# EAGLE board panelized (EAGLE 5.07), part 1 of 2
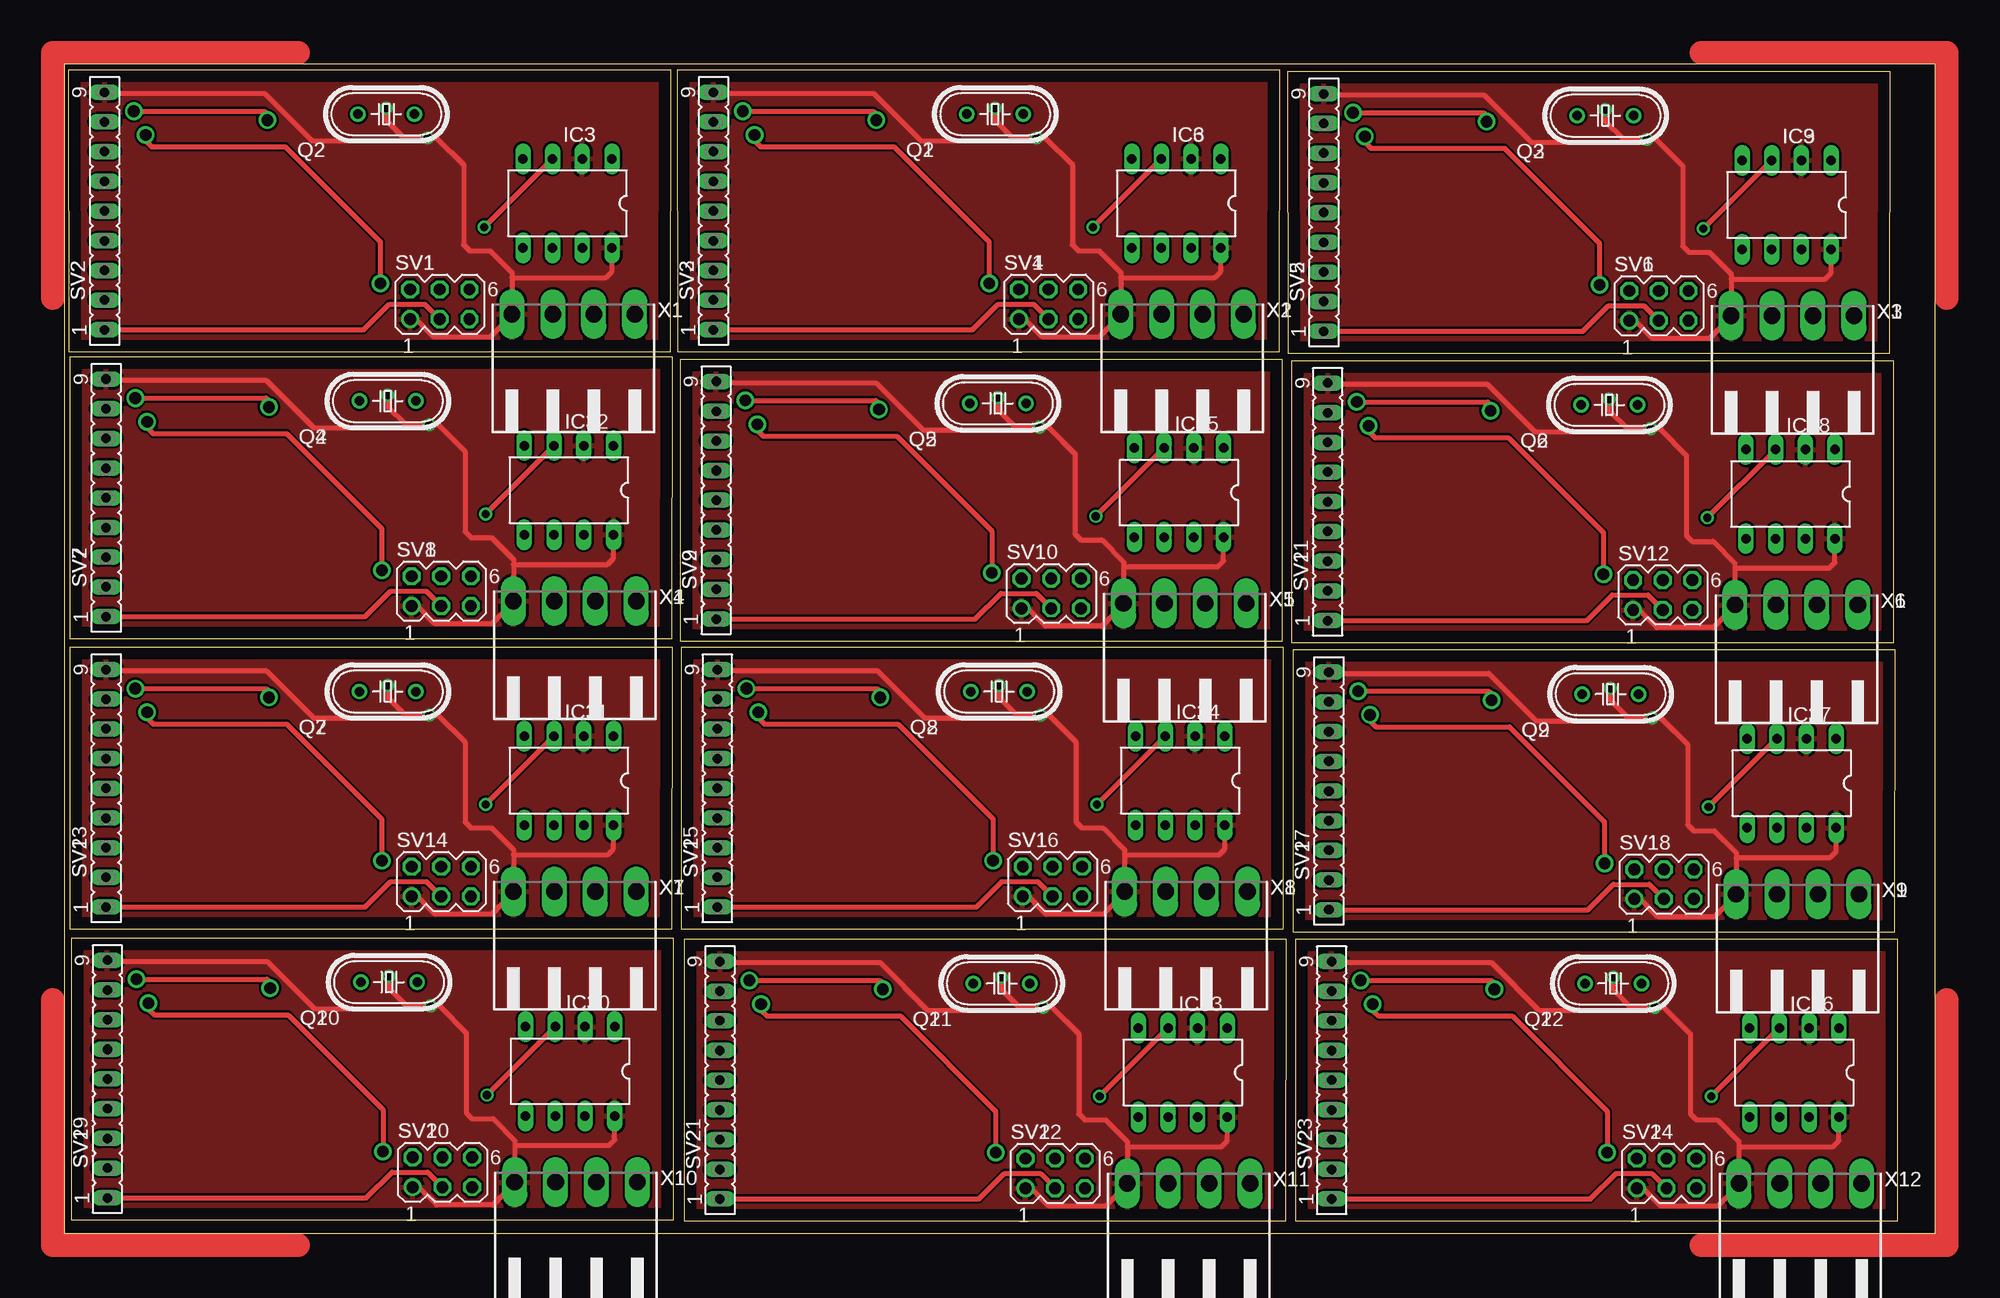
[diagram p0: board, top side]
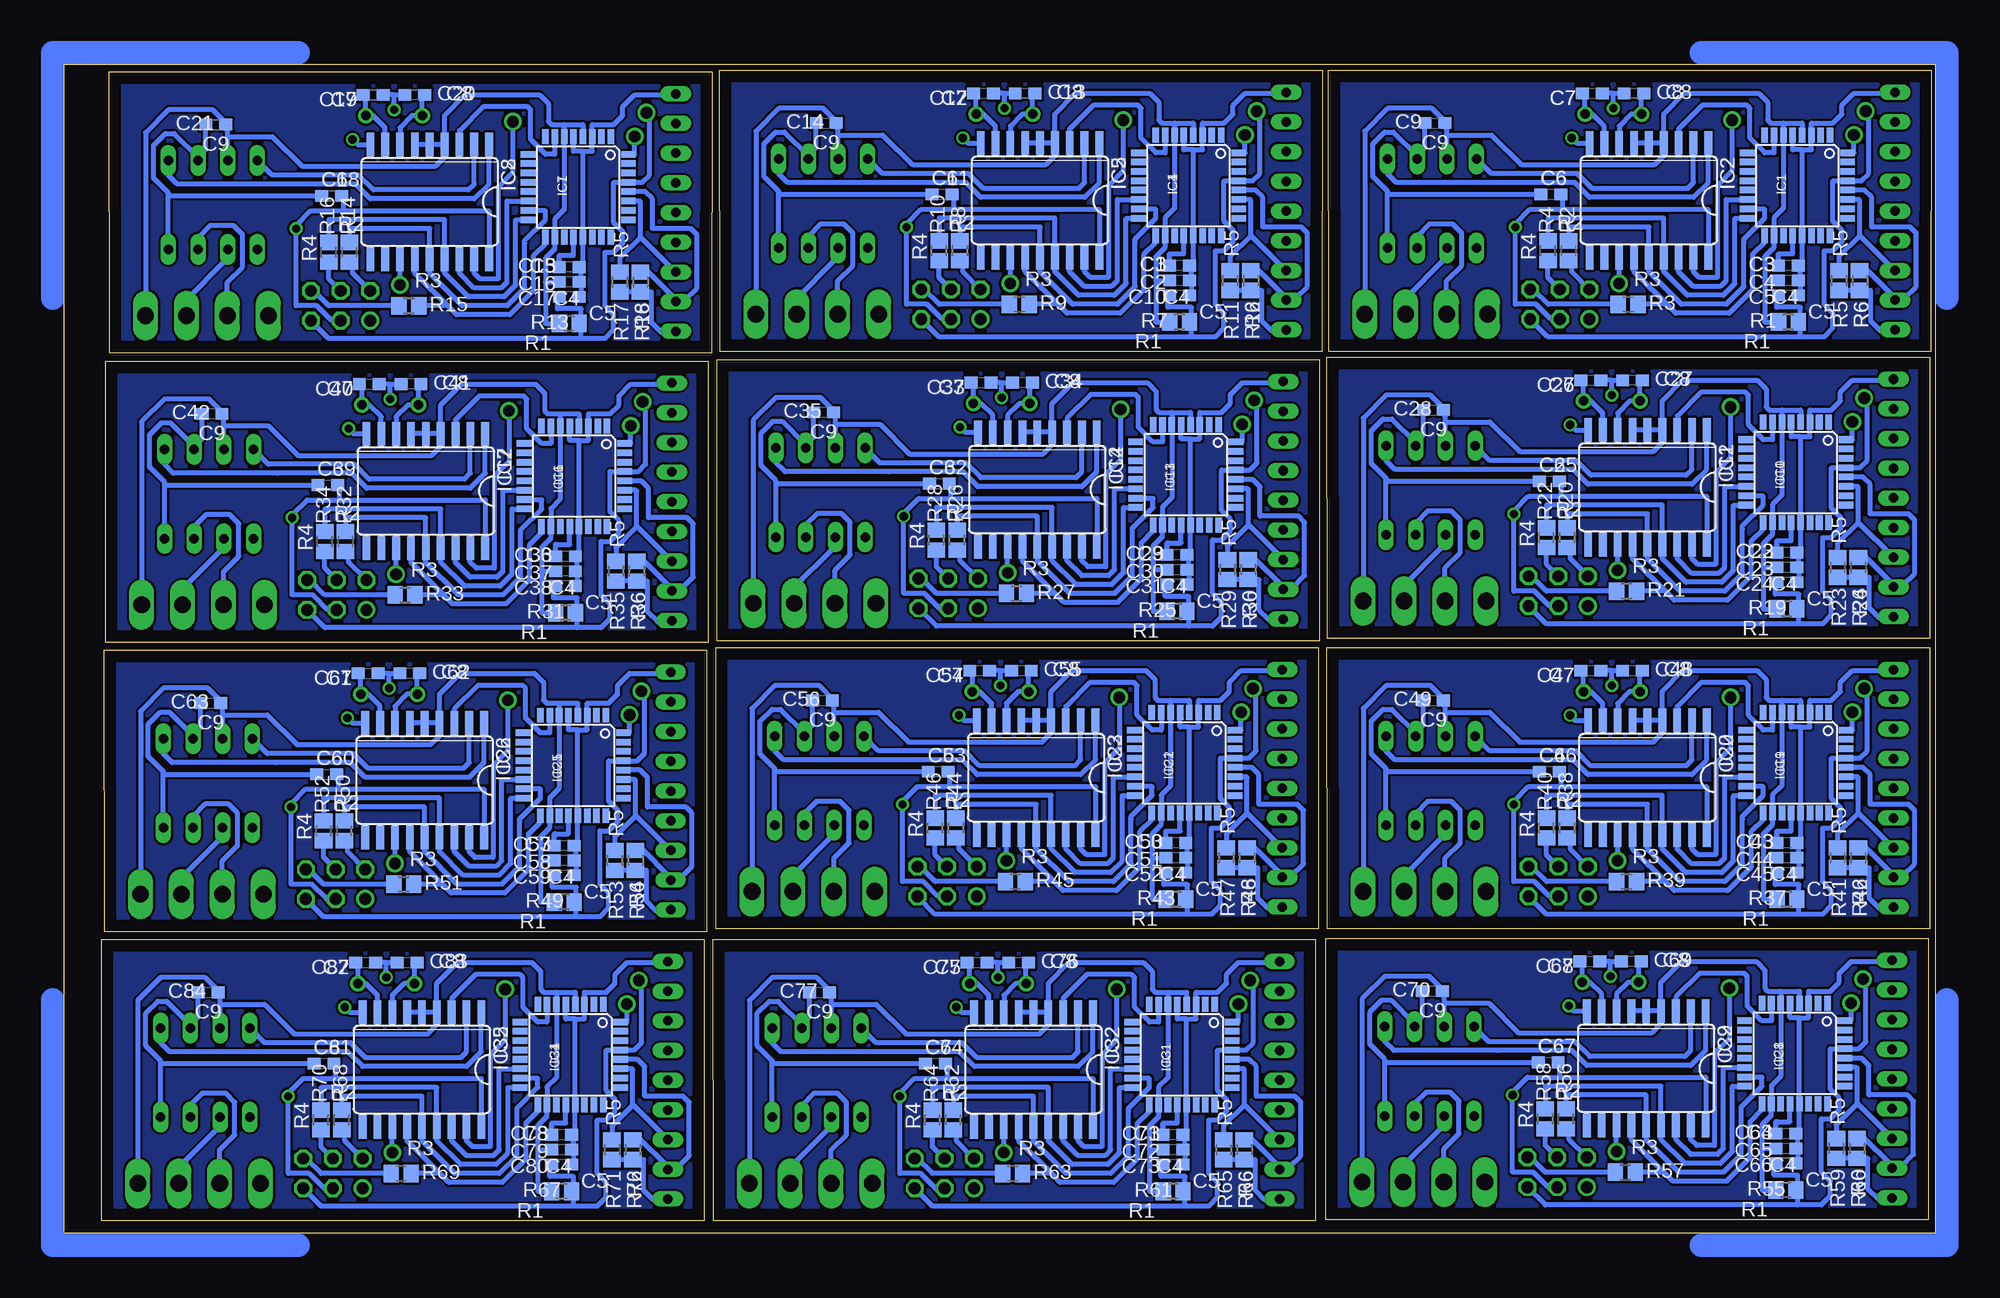
[diagram p1: board, bottom side, seen from below]

Size 160 x 100 mm. Coordinates in mm from the lower left corner, seen from the top.
Outline: 0,0 160,0 160,100 0,100 0,0
Outline: 0.36,75.41 51.87,75.42 51.88,99.5 0.35,99.49 0.36,75.41
Outline: 52.43,75.41 103.94,75.42 103.95,99.5 52.42,99.49 52.43,75.41
Outline: 104.62,75.29 156.13,75.29 156.15,99.37 104.62,99.36 104.62,75.29
Outline: 0.48,50.88 51.99,50.88 52.01,74.96 0.48,74.96 0.48,50.88
Outline: 52.66,50.67 104.16,50.67 104.18,74.76 52.65,74.75 52.66,50.67
Outline: 104.95,50.55 156.46,50.55 156.48,74.63 104.95,74.62 104.95,50.55
Outline: 0.48,26.04 51.99,26.04 52.01,50.12 0.48,50.11 0.48,26.04
Outline: 52.76,26.04 104.27,26.04 104.28,50.12 52.76,50.11 52.76,26.04
Outline: 105.06,25.81 156.56,25.81 156.58,49.89 105.05,49.89 105.06,25.81
Outline: 0.59,1.17 52.09,1.17 52.11,25.25 0.58,25.25 0.59,1.17
Outline: 52.99,1.07 104.49,1.07 104.51,25.15 52.98,25.15 52.99,1.07
Outline: 105.28,1.07 156.79,1.07 156.81,25.15 105.28,25.15 105.28,1.07
Copper layers (1*16): Top 0.035mm / dielectric 1.5mm / Bottom 0.035mm
Design rules "default": minimum track width 10mil, minimum drill 24mil, track to track 8mil, track to pad 8mil, pad to pad 8mil, via to via 8mil, smd to smd 8mil, copper to edge 40mil, drill to drill 8mil, minimum pad ring 10mil, minimum via ring 8mil, stop-mask expansion 4mil, vias tented up to drill 0mil, thermal gap 10mil

## Footprints (pad centres in the part's own frame; a part is rotated, then mirrored left to right if it is on the bottom)
C0603 = smd 1.1 x 1: 1 -0.85,0; 2 0.85,0
TQFP32-08 = smd 1.27 x 0.559: 1 -4.293,2.8; 2 -4.293,2; 3 -4.293,1.2; 4 -4.293,0.4; 5 -4.293,-0.4; 6 -4.293,-1.2; 7 -4.293,-2; 8 -4.293,-2.8; 17 4.293,-2.8; 18 4.293,-2; 19 4.293,-1.2; 20 4.293,-0.4; 21 4.293,0.4; 22 4.293,1.2; 23 4.293,2; 24 4.293,2.8 | smd 0.559 x 1.27: 9 -2.8,-4.293; 10 -2,-4.293; 11 -1.2,-4.293; 12 -0.4,-4.293; 13 0.4,-4.293; 14 1.2,-4.293; 15 2,-4.293; 16 2.8,-4.293; 25 2.8,4.293; 26 2,4.293; 27 1.2,4.293; 28 0.4,4.293; 29 -0.4,4.293; 30 -1.2,4.293; 31 -2,4.293; 32 -2.8,4.293
SO18L = smd 0.66 x 2.032: 1 -5.08,-4.902; 2 -3.81,-4.902; 3 -2.54,-4.902; 4 -1.27,-4.902; 5 0,-4.902; 6 1.27,-4.902; 7 2.54,-4.902; 8 3.81,-4.902; 9 5.08,-4.902; 10 5.08,4.902; 11 3.81,4.902; 12 2.54,4.902; 13 1.27,4.902; 14 0,4.902; 15 -1.27,4.902; 16 -2.54,4.902; 17 -3.81,4.902; 18 -5.08,4.902
DIL08 = drill 0.813 long: 1 -3.81,-3.81; 2 -1.27,-3.81; 3 1.27,-3.81; 4 3.81,-3.81; 5 3.81,3.81; 6 1.27,3.81; 7 -1.27,3.81; 8 -3.81,3.81
HC49U-V = drill 0.813 round: 1 -2.413,0; 2 2.413,0
R0805 = smd 1.3 x 1.5: 1 -0.85,0; 2 0.85,0
MA03-2 = drill 1.016 round: 1 -2.54,-1.27 | drill 1.016 octagon: 2 -2.54,1.27; 3 0,-1.27; 4 0,1.27; 5 2.54,-1.27; 6 2.54,1.27
FE09 = drill 0.813 long: 1 -10.16,0; 2 -7.62,0; 3 -5.08,0; 4 -2.54,0; 5 0,0; 6 2.54,0; 7 5.08,0; 8 7.62,0; 9 10.16,0
90-4 = drill 1.422 long: 1 -5.25,5.25; 2 -1.75,5.25; 3 1.75,5.25; 4 5.25,5.25

## Placement (x,y rotation side)
C1  100n  [C0603]  64.62,82.78 180 bottom
C2  100n  [C0603]  64.62,81.51 180 bottom
C3  100n  [C0603]  12.55,82.78 180 bottom
C4  100n  [C0603]  12.55,81.51 180 bottom
C5  100n  [C0603]  12.55,80.24 180 bottom
C6  100n  [C0603]  32.87,88.87 0 bottom
C7  22p  [C0603]  29.31,97.51 0 bottom
C8  22p  [C0603]  25.76,97.51 180 bottom
C9  100n  [C0603]  42.77,94.97 0 bottom
C10  100n  [C0603]  64.62,80.24 180 bottom
C11  100n  [C0603]  84.94,88.87 0 bottom
C12  22p  [C0603]  81.38,97.51 0 bottom
C13  22p  [C0603]  77.83,97.51 180 bottom
C14  100n  [C0603]  94.84,94.97 0 bottom
C15  100n  [C0603]  116.81,82.65 180 bottom
C16  100n  [C0603]  116.81,81.38 180 bottom
C17  100n  [C0603]  116.81,80.11 180 bottom
C18  100n  [C0603]  137.13,88.75 0 bottom
C19  22p  [C0603]  133.58,97.38 0 bottom
C20  22p  [C0603]  130.02,97.38 180 bottom
C21  100n  [C0603]  147.04,94.84 0 bottom
C22  100n  [C0603]  12.67,58.24 180 bottom
C23  100n  [C0603]  12.67,56.97 180 bottom
C24  100n  [C0603]  12.67,55.7 180 bottom
C25  100n  [C0603]  32.99,64.34 0 bottom
C26  22p  [C0603]  29.44,72.97 0 bottom
C27  22p  [C0603]  25.88,72.97 180 bottom
C28  100n  [C0603]  42.9,70.43 0 bottom
C29  100n  [C0603]  64.85,58.04 180 bottom
C30  100n  [C0603]  64.85,56.77 180 bottom
C31  100n  [C0603]  64.85,55.5 180 bottom
C32  100n  [C0603]  85.17,64.14 0 bottom
C33  22p  [C0603]  81.61,72.77 0 bottom
C34  22p  [C0603]  78.05,72.77 180 bottom
C35  100n  [C0603]  95.07,70.23 0 bottom
C36  100n  [C0603]  117.14,57.91 180 bottom
C37  100n  [C0603]  117.14,56.64 180 bottom
C38  100n  [C0603]  117.14,55.37 180 bottom
C39  100n  [C0603]  137.46,64.01 0 bottom
C40  22p  [C0603]  133.91,72.64 0 bottom
C41  22p  [C0603]  130.35,72.64 180 bottom
C42  100n  [C0603]  147.37,70.1 0 bottom
C43  100n  [C0603]  12.67,33.4 180 bottom
C44  100n  [C0603]  12.67,32.13 180 bottom
C45  100n  [C0603]  12.67,30.86 180 bottom
C46  100n  [C0603]  32.99,39.5 0 bottom
C47  22p  [C0603]  29.44,48.13 0 bottom
C48  22p  [C0603]  25.88,48.13 180 bottom
C49  100n  [C0603]  42.9,45.59 0 bottom
C50  100n  [C0603]  64.95,33.4 180 bottom
C51  100n  [C0603]  64.95,32.13 180 bottom
C52  100n  [C0603]  64.95,30.86 180 bottom
C53  100n  [C0603]  85.27,39.5 0 bottom
C54  22p  [C0603]  81.71,48.13 0 bottom
C55  22p  [C0603]  78.16,48.13 180 bottom
C56  100n  [C0603]  95.17,45.59 0 bottom
C57  100n  [C0603]  117.25,33.17 180 bottom
C58  100n  [C0603]  117.25,31.9 180 bottom
C59  100n  [C0603]  117.25,30.63 180 bottom
C60  100n  [C0603]  137.57,39.27 0 bottom
C61  22p  [C0603]  134.01,47.9 0 bottom
C62  22p  [C0603]  130.45,47.9 180 bottom
C63  100n  [C0603]  147.47,45.36 0 bottom
C64  100n  [C0603]  12.78,8.53 180 bottom
C65  100n  [C0603]  12.78,7.26 180 bottom
C66  100n  [C0603]  12.78,5.99 180 bottom
C67  100n  [C0603]  33.1,14.63 0 bottom
C68  22p  [C0603]  29.54,23.27 0 bottom
C69  22p  [C0603]  25.98,23.27 180 bottom
C70  100n  [C0603]  43,20.73 0 bottom
C71  100n  [C0603]  65.18,8.43 180 bottom
C72  100n  [C0603]  65.18,7.16 180 bottom
C73  100n  [C0603]  65.18,5.89 180 bottom
C74  100n  [C0603]  85.5,14.53 0 bottom
C75  22p  [C0603]  81.94,23.16 0 bottom
C76  22p  [C0603]  78.38,23.16 180 bottom
C77  100n  [C0603]  95.4,20.62 0 bottom
C78  100n  [C0603]  117.47,8.43 180 bottom
C79  100n  [C0603]  117.47,7.16 180 bottom
C80  100n  [C0603]  117.47,5.89 180 bottom
C81  100n  [C0603]  137.79,14.53 0 bottom
C82  22p  [C0603]  134.24,23.16 0 bottom
C83  22p  [C0603]  130.68,23.16 180 bottom
C84  100n  [C0603]  147.7,20.62 0 bottom
IC1  MEGA8-AI  [TQFP32-08]  11.79,89.64 270 bottom
IC2  MCP2515-E/SO  [SO18L]  24.49,88.37 180 bottom
IC3  PCA82C250  [DIL08]  43.03,88.11 180 top
IC4  MEGA8-AI  [TQFP32-08]  63.86,89.64 270 bottom
IC5  MCP2515-E/SO  [SO18L]  76.56,88.37 180 bottom
IC6  PCA82C250  [DIL08]  95.1,88.11 180 top
IC7  MEGA8-AI  [TQFP32-08]  116.05,89.51 270 bottom
IC8  MCP2515-E/SO  [SO18L]  128.75,88.24 180 bottom
IC9  PCA82C250  [DIL08]  147.29,87.99 180 top
IC10  MEGA8-AI  [TQFP32-08]  11.91,65.1 270 bottom
IC11  MCP2515-E/SO  [SO18L]  24.61,63.83 180 bottom
IC12  PCA82C250  [DIL08]  43.15,63.58 180 top
IC13  MEGA8-AI  [TQFP32-08]  64.08,64.9 270 bottom
IC14  MCP2515-E/SO  [SO18L]  76.78,63.63 180 bottom
IC15  PCA82C250  [DIL08]  95.33,63.37 180 top
IC16  MEGA8-AI  [TQFP32-08]  116.38,64.77 270 bottom
IC17  MCP2515-E/SO  [SO18L]  129.08,63.5 180 bottom
IC18  PCA82C250  [DIL08]  147.62,63.25 180 top
IC19  MEGA8-AI  [TQFP32-08]  11.91,40.26 270 bottom
IC20  MCP2515-E/SO  [SO18L]  24.61,38.99 180 bottom
IC21  PCA82C250  [DIL08]  43.15,38.73 180 top
IC22  MEGA8-AI  [TQFP32-08]  64.19,40.26 270 bottom
IC23  MCP2515-E/SO  [SO18L]  76.89,38.99 180 bottom
IC24  PCA82C250  [DIL08]  95.43,38.73 180 top
IC25  MEGA8-AI  [TQFP32-08]  116.48,40.03 270 bottom
IC26  MCP2515-E/SO  [SO18L]  129.18,38.76 180 bottom
IC27  PCA82C250  [DIL08]  147.73,38.51 180 top
IC28  MEGA8-AI  [TQFP32-08]  12.01,15.39 270 bottom
IC29  MCP2515-E/SO  [SO18L]  24.71,14.12 180 bottom
IC30  PCA82C250  [DIL08]  43.26,13.87 180 top
IC31  MEGA8-AI  [TQFP32-08]  64.41,15.29 270 bottom
IC32  MCP2515-E/SO  [SO18L]  77.11,14.02 180 bottom
IC33  PCA82C250  [DIL08]  95.66,13.77 180 top
IC34  MEGA8-AI  [TQFP32-08]  116.71,15.29 270 bottom
IC35  MCP2515-E/SO  [SO18L]  129.41,14.02 180 bottom
IC36  PCA82C250  [DIL08]  147.96,13.77 180 top
Q1  16MHz  [HC49U-V]  79.6,95.73 0 top
Q2  16MHz  [HC49U-V]  27.53,95.73 0 top
Q3  16MHz  [HC49U-V]  131.8,95.61 0 top
Q4  16MHz  [HC49U-V]  27.66,71.2 0 top
Q5  16MHz  [HC49U-V]  79.83,70.99 0 top
Q6  16MHz  [HC49U-V]  132.13,70.87 0 top
Q7  16MHz  [HC49U-V]  27.66,46.35 0 top
Q8  16MHz  [HC49U-V]  79.93,46.35 0 top
Q9  16MHz  [HC49U-V]  132.23,46.13 0 top
Q10  16MHz  [HC49U-V]  27.76,21.49 0 top
Q11  16MHz  [HC49U-V]  80.16,21.39 0 top
Q12  16MHz  [HC49U-V]  132.46,21.39 0 top
R1  10K  [R0805]  12.55,77.95 180 bottom
R2  4K7  [R0805]  31.34,84.05 90 bottom
R3  4K7  [R0805]  26.26,79.48 0 bottom
R4  4K7  [R0805]  33.12,84.05 90 bottom
R5  4K7  [R0805]  8.23,81.51 270 bottom
R6  4K7  [R0805]  6.45,81.51 270 bottom
R7  10K  [R0805]  64.62,77.95 180 bottom
R8  4K7  [R0805]  83.41,84.05 90 bottom
R9  4K7  [R0805]  78.33,79.48 0 bottom
R10  4K7  [R0805]  85.19,84.05 90 bottom
R11  4K7  [R0805]  60.3,81.51 270 bottom
R12  4K7  [R0805]  58.52,81.51 270 bottom
R13  10K  [R0805]  116.81,77.83 180 bottom
R14  4K7  [R0805]  135.61,83.92 90 bottom
R15  4K7  [R0805]  130.53,79.35 0 bottom
R16  4K7  [R0805]  137.39,83.92 90 bottom
R17  4K7  [R0805]  112.5,81.38 270 bottom
R18  4K7  [R0805]  110.72,81.38 270 bottom
R19  10K  [R0805]  12.67,53.42 180 bottom
R20  4K7  [R0805]  31.47,59.51 90 bottom
R21  4K7  [R0805]  26.39,54.94 0 bottom
R22  4K7  [R0805]  33.25,59.51 90 bottom
R23  4K7  [R0805]  8.36,56.97 270 bottom
R24  4K7  [R0805]  6.58,56.97 270 bottom
R25  10K  [R0805]  64.85,53.21 180 bottom
R26  4K7  [R0805]  83.64,59.31 90 bottom
R27  4K7  [R0805]  78.56,54.74 0 bottom
R28  4K7  [R0805]  85.42,59.31 90 bottom
R29  4K7  [R0805]  60.53,56.77 270 bottom
R30  4K7  [R0805]  58.75,56.77 270 bottom
R31  10K  [R0805]  117.14,53.09 180 bottom
R32  4K7  [R0805]  135.94,59.18 90 bottom
R33  4K7  [R0805]  130.86,54.61 0 bottom
R34  4K7  [R0805]  137.72,59.18 90 bottom
R35  4K7  [R0805]  112.83,56.64 270 bottom
R36  4K7  [R0805]  111.05,56.64 270 bottom
R37  10K  [R0805]  12.67,28.57 180 bottom
R38  4K7  [R0805]  31.47,34.67 90 bottom
R39  4K7  [R0805]  26.39,30.1 0 bottom
R40  4K7  [R0805]  33.25,34.67 90 bottom
R41  4K7  [R0805]  8.36,32.13 270 bottom
R42  4K7  [R0805]  6.58,32.13 270 bottom
R43  10K  [R0805]  64.95,28.57 180 bottom
R44  4K7  [R0805]  83.74,34.67 90 bottom
R45  4K7  [R0805]  78.66,30.1 0 bottom
R46  4K7  [R0805]  85.52,34.67 90 bottom
R47  4K7  [R0805]  60.63,32.13 270 bottom
R48  4K7  [R0805]  58.85,32.13 270 bottom
R49  10K  [R0805]  117.25,28.35 180 bottom
R50  4K7  [R0805]  136.04,34.44 90 bottom
R51  4K7  [R0805]  130.96,29.87 0 bottom
R52  4K7  [R0805]  137.82,34.44 90 bottom
R53  4K7  [R0805]  112.93,31.9 270 bottom
R54  4K7  [R0805]  111.15,31.9 270 bottom
R55  10K  [R0805]  12.78,3.71 180 bottom
R56  4K7  [R0805]  31.57,9.8 90 bottom
R57  4K7  [R0805]  26.49,5.23 0 bottom
R58  4K7  [R0805]  33.35,9.8 90 bottom
R59  4K7  [R0805]  8.46,7.26 270 bottom
R60  4K7  [R0805]  6.68,7.26 270 bottom
R61  10K  [R0805]  65.18,3.61 180 bottom
R62  4K7  [R0805]  83.97,9.7 90 bottom
R63  4K7  [R0805]  78.89,5.13 0 bottom
R64  4K7  [R0805]  85.75,9.7 90 bottom
R65  4K7  [R0805]  60.86,7.16 270 bottom
R66  4K7  [R0805]  59.08,7.16 270 bottom
R67  10K  [R0805]  117.47,3.61 180 bottom
R68  4K7  [R0805]  136.27,9.7 90 bottom
R69  4K7  [R0805]  131.19,5.13 0 bottom
R70  4K7  [R0805]  138.05,9.7 90 bottom
R71  4K7  [R0805]  113.16,7.16 270 bottom
R72  4K7  [R0805]  111.38,7.16 270 bottom
SV1  [MA03-2]  32.11,79.48 0 top
SV2  [FE09]  3.45,87.45 90 top
SV3  [FE09]  55.52,87.45 90 top
SV4  [MA03-2]  84.18,79.48 0 top
SV5  [FE09]  107.72,87.32 90 top
SV6  [MA03-2]  136.37,79.35 0 top
SV7  [FE09]  3.58,62.91 90 top
SV8  [MA03-2]  32.23,54.94 0 top
SV9  [FE09]  55.75,62.71 90 top
SV10  [MA03-2]  84.4,54.74 0 top
SV11  [FE09]  108.05,62.58 90 top
SV12  [MA03-2]  136.7,54.61 0 top
SV13  [FE09]  3.58,38.07 90 top
SV14  [MA03-2]  32.23,30.1 0 top
SV15  [FE09]  55.85,38.07 90 top
SV16  [MA03-2]  84.51,30.1 0 top
SV17  [FE09]  108.15,37.84 90 top
SV18  [MA03-2]  136.8,29.87 0 top
SV19  [FE09]  3.68,13.21 90 top
SV20  [MA03-2]  32.33,5.23 0 top
SV21  [FE09]  56.08,13.1 90 top
SV22  [MA03-2]  84.73,5.13 0 top
SV23  [FE09]  108.38,13.1 90 top
SV24  [MA03-2]  137.03,5.13 0 top
X1  [90-4]  43.54,73.38 0 top
X2  [90-4]  95.61,73.38 0 top
X3  [90-4]  147.8,73.25 0 top
X4  [90-4]  43.66,48.84 0 top
X5  [90-4]  95.83,48.64 0 top
X6  [90-4]  148.13,48.51 0 top
X7  [90-4]  43.66,24 0 top
X8  [90-4]  95.94,24 0 top
X9  [90-4]  148.23,23.77 0 top
X10  [90-4]  43.76,-0.86 0 top
X11  [90-4]  96.16,-0.97 0 top
X12  [90-4]  148.46,-0.97 0 top

## Library data of the parts
C1-C84 R1-R72 = rcl
IC1 IC4 IC7 IC10 IC13 IC16 IC19 IC22 IC25 IC28 IC31 IC34 = atmel
IC2 IC5 IC8 IC11 IC14 IC17 IC20 IC23 IC26 IC29 IC32 IC35 = mcp2515
IC3 IC6 IC9 IC12 IC15 IC18 IC21 IC24 IC27 IC30 IC33 IC36 = micro-philips
Q1-Q12 = crystal
SV1 SV4 SV6 SV8 SV10 SV12 SV14 SV16 SV18 SV20 SV22 SV24 = con-lstb
SV2 SV3 SV5 SV7 SV9 SV11 SV13 SV15 SV17 SV19 SV21 SV23 = con-lsta
X1-X12 = con-weidmueller-sl35

## Nets
GND: C3.1 C4.1 C5.1 C6.1 C7.2 C8.2 C9.1 IC1.3 IC1.5 IC1.21 IC2.9 IC3.2 IC3.8 SV1.1 SV2.9 X1.1
GND1: C1.1 C2.1 C10.1 C11.1 C12.2 C13.2 C14.1 IC4.3 IC4.5 IC4.21 IC5.9 IC6.2 IC6.8 SV3.9 SV4.1 X2.1
GND2: C15.1 C16.1 C17.1 C18.1 C19.2 C20.2 C21.1 IC7.3 IC7.5 IC7.21 IC8.9 IC9.2 IC9.8 SV5.9 SV6.1 X3.1
GND3: C22.1 C23.1 C24.1 C25.1 C26.2 C27.2 C28.1 IC10.3 IC10.5 IC10.21 IC11.9 IC12.2 IC12.8 SV7.9 SV8.1 X4.1
GND4: C29.1 C30.1 C31.1 C32.1 C33.2 C34.2 C35.1 IC13.3 IC13.5 IC13.21 IC14.9 IC15.2 IC15.8 SV9.9 SV10.1 X5.1
GND5: C36.1 C37.1 C38.1 C39.1 C40.2 C41.2 C42.1 IC16.3 IC16.5 IC16.21 IC17.9 IC18.2 IC18.8 SV11.9 SV12.1 X6.1
GND6: C43.1 C44.1 C45.1 C46.1 C47.2 C48.2 C49.1 IC19.3 IC19.5 IC19.21 IC20.9 IC21.2 IC21.8 SV13.9 SV14.1 X7.1
GND7: C50.1 C51.1 C52.1 C53.1 C54.2 C55.2 C56.1 IC22.3 IC22.5 IC22.21 IC23.9 IC24.2 IC24.8 SV15.9 SV16.1 X8.1
GND8: C57.1 C58.1 C59.1 C60.1 C61.2 C62.2 C63.1 IC25.3 IC25.5 IC25.21 IC26.9 IC27.2 IC27.8 SV17.9 SV18.1 X9.1
GND9: C64.1 C65.1 C66.1 C67.1 C68.2 C69.2 C70.1 IC28.3 IC28.5 IC28.21 IC29.9 IC30.2 IC30.8 SV19.9 SV20.1 X10.1
GND10: C71.1 C72.1 C73.1 C74.1 C75.2 C76.2 C77.1 IC31.3 IC31.5 IC31.21 IC32.9 IC33.2 IC33.8 SV21.9 SV22.1 X11.1
GND11: C78.1 C79.1 C80.1 C81.1 C82.2 C83.2 C84.1 IC34.3 IC34.5 IC34.21 IC35.9 IC36.2 IC36.8 SV23.9 SV24.1 X12.1
INT: IC1.32 IC2.12
INT1: IC4.32 IC5.12
INT2: IC7.32 IC8.12
INT3: IC10.32 IC11.12
INT4: IC13.32 IC14.12
INT5: IC16.32 IC17.12
INT6: IC19.32 IC20.12
INT7: IC22.32 IC23.12
INT8: IC25.32 IC26.12
INT9: IC28.32 IC29.12
INT10: IC31.32 IC32.12
INT11: IC34.32 IC35.12
MISO: IC1.16 IC2.15 R4.2
MISO1: IC4.16 IC5.15 R10.2
MISO2: IC7.16 IC8.15 R16.2
MISO3: IC10.16 IC11.15 R22.2
MISO4: IC13.16 IC14.15 R28.2
MISO5: IC16.16 IC17.15 R34.2
MISO6: IC19.16 IC20.15 R40.2
MISO7: IC22.16 IC23.15 R46.2
MISO8: IC25.16 IC26.15 R52.2
MISO9: IC28.16 IC29.15 R58.2
MISO10: IC31.16 IC32.15 R64.2
MISO11: IC34.16 IC35.15 R70.2
MOSI: IC1.15 IC2.14 R2.2
MOSI1: IC4.15 IC5.14 R8.2
MOSI2: IC7.15 IC8.14 R14.2
MOSI3: IC10.15 IC11.14 R20.2
MOSI4: IC13.15 IC14.14 R26.2
MOSI5: IC16.15 IC17.14 R32.2
MOSI6: IC19.15 IC20.14 R38.2
MOSI7: IC22.15 IC23.14 R44.2
MOSI8: IC25.15 IC26.14 R50.2
MOSI9: IC28.15 IC29.14 R56.2
MOSI10: IC31.15 IC32.14 R62.2
MOSI11: IC34.15 IC35.14 R68.2
N$1: IC3.7 X1.2
N$2: IC3.6 X1.3
N$4: C1.2 IC4.20
N$5: C3.2 IC1.20
N$6: IC5.1 IC6.1
N$7: IC5.2 IC6.4
N$8: IC1.7 IC2.3
N$9: C12.1 IC5.8 Q1.2
N$10: C13.1 IC5.7 Q1.1
N$11: IC2.1 IC3.1
N$12: IC2.2 IC3.4
N$13: C7.1 IC2.8 Q2.2
N$14: C8.1 IC2.7 Q2.1
N$15: R2.1 SV1.2
N$16: R3.1 SV1.6
N$17: R4.1 SV1.4
N$18: IC6.7 X2.2
N$19: IC6.6 X2.3
N$20: R8.1 SV4.2
N$21: R9.1 SV4.6
N$22: R10.1 SV4.4
N$23: IC4.7 IC5.3
N$25: C15.2 IC7.20
N$26: IC8.1 IC9.1
N$27: IC8.2 IC9.4
N$28: C19.1 IC8.8 Q3.2
N$29: C20.1 IC8.7 Q3.1
N$30: IC9.7 X3.2
N$31: IC9.6 X3.3
N$32: R14.1 SV6.2
N$33: R15.1 SV6.6
N$34: R16.1 SV6.4
N$35: IC7.7 IC8.3
N$37: C22.2 IC10.20
N$38: IC11.1 IC12.1
N$39: IC11.2 IC12.4
N$40: C26.1 IC11.8 Q4.2
N$41: C27.1 IC11.7 Q4.1
N$42: IC12.7 X4.2
N$43: IC12.6 X4.3
N$44: R20.1 SV8.2
N$45: R21.1 SV8.6
N$46: R22.1 SV8.4
N$47: IC10.7 IC11.3
N$49: C29.2 IC13.20
N$50: IC14.1 IC15.1
N$51: IC14.2 IC15.4
N$52: C33.1 IC14.8 Q5.2
N$53: C34.1 IC14.7 Q5.1
N$54: IC15.7 X5.2
N$55: IC15.6 X5.3
N$56: R26.1 SV10.2
N$57: R27.1 SV10.6
N$58: R28.1 SV10.4
N$59: IC13.7 IC14.3
N$61: C36.2 IC16.20
N$62: IC17.1 IC18.1
N$63: IC17.2 IC18.4
N$64: C40.1 IC17.8 Q6.2
N$65: C41.1 IC17.7 Q6.1
N$66: IC18.7 X6.2
N$67: IC18.6 X6.3
N$68: R32.1 SV12.2
N$69: R33.1 SV12.6
N$70: R34.1 SV12.4
N$71: IC16.7 IC17.3
N$73: C43.2 IC19.20
N$74: IC20.1 IC21.1
N$75: IC20.2 IC21.4
N$76: C47.1 IC20.8 Q7.2
N$77: C48.1 IC20.7 Q7.1
N$78: IC21.7 X7.2
N$79: IC21.6 X7.3
N$80: R38.1 SV14.2
N$81: R39.1 SV14.6
N$82: R40.1 SV14.4
N$83: IC19.7 IC20.3
N$85: C50.2 IC22.20
N$86: IC23.1 IC24.1
N$87: IC23.2 IC24.4
N$88: C54.1 IC23.8 Q8.2
N$89: C55.1 IC23.7 Q8.1
N$90: IC24.7 X8.2
N$91: IC24.6 X8.3
N$92: R44.1 SV16.2
N$93: R45.1 SV16.6
N$94: R46.1 SV16.4
N$95: IC22.7 IC23.3
N$97: C57.2 IC25.20
N$98: IC26.1 IC27.1
N$99: IC26.2 IC27.4
N$100: C61.1 IC26.8 Q9.2
N$101: C62.1 IC26.7 Q9.1
N$102: IC27.7 X9.2
N$103: IC27.6 X9.3
N$104: R50.1 SV18.2
N$105: R51.1 SV18.6
N$106: R52.1 SV18.4
N$107: IC25.7 IC26.3
N$109: C64.2 IC28.20
N$110: IC29.1 IC30.1
N$111: IC29.2 IC30.4
N$112: C68.1 IC29.8 Q10.2
N$113: C69.1 IC29.7 Q10.1
N$114: IC30.7 X10.2
N$115: IC30.6 X10.3
N$116: R56.1 SV20.2
N$117: R57.1 SV20.6
N$118: R58.1 SV20.4
N$119: IC28.7 IC29.3
N$121: C71.2 IC31.20
N$122: IC32.1 IC33.1
N$123: IC32.2 IC33.4
N$124: C75.1 IC32.8 Q11.2
N$125: C76.1 IC32.7 Q11.1
N$126: IC33.7 X11.2
N$127: IC33.6 X11.3
N$128: R62.1 SV22.2
N$129: R63.1 SV22.6
N$130: R64.1 SV22.4
N$131: IC31.7 IC32.3
N$133: C78.2 IC34.20
N$134: IC35.1 IC36.1
N$135: IC35.2 IC36.4
N$136: C82.1 IC35.8 Q12.2
N$137: C83.1 IC35.7 Q12.1
N$138: IC36.7 X12.2
N$139: IC36.6 X12.3
N$140: R68.1 SV24.2
N$141: R69.1 SV24.6
N$142: R70.1 SV24.4
N$143: IC34.7 IC35.3
RST: C5.2 IC1.29 IC2.17 R1.1 SV1.5
RST1: C10.2 IC4.29 IC5.17 R7.1 SV4.5
RST2: C17.2 IC7.29 IC8.17 R13.1 SV6.5
RST3: C24.2 IC10.29 IC11.17 R19.1 SV8.5
RST4: C31.2 IC13.29 IC14.17 R25.1 SV10.5
RST5: C38.2 IC16.29 IC17.17 R31.1 SV12.5
RST6: C45.2 IC19.29 IC20.17 R37.1 SV14.5
RST7: C52.2 IC22.29 IC23.17 R43.1 SV16.5
RST8: C59.2 IC25.29 IC26.17 R49.1 SV18.5
RST9: C66.2 IC28.29 IC29.17 R55.1 SV20.5
RST10: C73.2 IC31.29 IC32.17 R61.1 SV22.5
RST11: C80.2 IC34.29 IC35.17 R67.1 SV24.5
SCK: IC1.17 IC2.13 R3.2
SCK1: IC4.17 IC5.13 R9.2
SCK2: IC7.17 IC8.13 R15.2
SCK3: IC10.17 IC11.13 R21.2
SCK4: IC13.17 IC14.13 R27.2
SCK5: IC16.17 IC17.13 R33.2
SCK6: IC19.17 IC20.13 R39.2
SCK7: IC22.17 IC23.13 R45.2
SCK8: IC25.17 IC26.13 R51.2
SCK9: IC28.17 IC29.13 R57.2
SCK10: IC31.17 IC32.13 R63.2
SCK11: IC34.17 IC35.13 R69.2
SCL: IC1.28 R6.1 SV2.2
SCL1: IC4.28 R12.1 SV3.2
SCL2: IC7.28 R18.1 SV5.2
SCL3: IC10.28 R24.1 SV7.2
SCL4: IC13.28 R30.1 SV9.2
SCL5: IC16.28 R36.1 SV11.2
SCL6: IC19.28 R42.1 SV13.2
SCL7: IC22.28 R48.1 SV15.2
SCL8: IC25.28 R54.1 SV17.2
SCL9: IC28.28 R60.1 SV19.2
SCL10: IC31.28 R66.1 SV21.2
SCL11: IC34.28 R72.1 SV23.2
SDA: IC1.27 R5.1 SV2.3
SDA1: IC4.27 R11.1 SV3.3
SDA2: IC7.27 R17.1 SV5.3
SDA3: IC10.27 R23.1 SV7.3
SDA4: IC13.27 R29.1 SV9.3
SDA5: IC16.27 R35.1 SV11.3
SDA6: IC19.27 R41.1 SV13.3
SDA7: IC22.27 R47.1 SV15.3
SDA8: IC25.27 R53.1 SV17.3
SDA9: IC28.27 R59.1 SV19.3
SDA10: IC31.27 R65.1 SV21.3
SDA11: IC34.27 R71.1 SV23.3
SS: IC1.14 IC2.16
SS1: IC4.14 IC5.16
SS2: IC7.14 IC8.16
SS3: IC10.14 IC11.16
SS4: IC13.14 IC14.16
SS5: IC16.14 IC17.16
SS6: IC19.14 IC20.16
SS7: IC22.14 IC23.16
SS8: IC25.14 IC26.16
SS9: IC28.14 IC29.16
SS10: IC31.14 IC32.16
SS11: IC34.14 IC35.16
VCC: C4.2 C6.2 C9.2 IC1.4 IC1.6 IC1.18 IC2.4 IC2.5 IC2.6 IC2.18 IC3.3 R1.2 R5.2 R6.2 SV1.3 SV2.1 X1.4
VCC1: C2.2 C11.2 C14.2 IC4.4 IC4.6 IC4.18 IC5.4 IC5.5 IC5.6 IC5.18 IC6.3 R7.2 R11.2 R12.2 SV3.1 SV4.3 X2.4
VCC2: C16.2 C18.2 C21.2 IC7.4 IC7.6 IC7.18 IC8.4 IC8.5 IC8.6 IC8.18 IC9.3 R13.2 R17.2 R18.2 SV5.1 SV6.3 X3.4
VCC3: C23.2 C25.2 C28.2 IC10.4 IC10.6 IC10.18 IC11.4 IC11.5 IC11.6 IC11.18 IC12.3 R19.2 R23.2 R24.2 SV7.1 SV8.3 X4.4
VCC4: C30.2 C32.2 C35.2 IC13.4 IC13.6 IC13.18 IC14.4 IC14.5 IC14.6 IC14.18 IC15.3 R25.2 R29.2 R30.2 SV9.1 SV10.3 X5.4
VCC5: C37.2 C39.2 C42.2 IC16.4 IC16.6 IC16.18 IC17.4 IC17.5 IC17.6 IC17.18 IC18.3 R31.2 R35.2 R36.2 SV11.1 SV12.3 X6.4
VCC6: C44.2 C46.2 C49.2 IC19.4 IC19.6 IC19.18 IC20.4 IC20.5 IC20.6 IC20.18 IC21.3 R37.2 R41.2 R42.2 SV13.1 SV14.3 X7.4
VCC7: C51.2 C53.2 C56.2 IC22.4 IC22.6 IC22.18 IC23.4 IC23.5 IC23.6 IC23.18 IC24.3 R43.2 R47.2 R48.2 SV15.1 SV16.3 X8.4
VCC8: C58.2 C60.2 C63.2 IC25.4 IC25.6 IC25.18 IC26.4 IC26.5 IC26.6 IC26.18 IC27.3 R49.2 R53.2 R54.2 SV17.1 SV18.3 X9.4
VCC9: C65.2 C67.2 C70.2 IC28.4 IC28.6 IC28.18 IC29.4 IC29.5 IC29.6 IC29.18 IC30.3 R55.2 R59.2 R60.2 SV19.1 SV20.3 X10.4
VCC10: C72.2 C74.2 C77.2 IC31.4 IC31.6 IC31.18 IC32.4 IC32.5 IC32.6 IC32.18 IC33.3 R61.2 R65.2 R66.2 SV21.1 SV22.3 X11.4
VCC11: C79.2 C81.2 C84.2 IC34.4 IC34.6 IC34.18 IC35.4 IC35.5 IC35.6 IC35.18 IC36.3 R67.2 R71.2 R72.2 SV23.1 SV24.3 X12.4

## Tracks (layer width: path | path; a pad name or v marks a point on that pad's centre or on a via)
GND  (via drill 0.7)
  Top 0.406: SV1.1 30.07,78.21 31.6,76.68 36.42,76.68 38.29,78.55 X1.1 38.29,81.76 | 29.06,93.7 v31.09,93.7 31.85,93.7 34.14,91.42 34.14,84.56 34.65,84.05 36.42,84.05 38.29,82.19 38.29,81.76 | 29.06,93.7 27.53,95.22 v27.53,96.24 | IC3.8 46.84,82.27 46.33,81.76 38.29,81.76 | 29.06,93.7 28.8,93.45 21.18,93.45 17.12,97.51 3.55,97.51 SV2.9
  Bottom 0.406: IC1.5 12.19,92.69 11.39,92.69 | 11.39,92.69 IC1.21 11.39,82.63 11.53,82.63 | 11.39,92.69 10.59,92.69 IC1.3 10.59,94.97 8.74,94.97 7.98,95.73 7.98,96.5 6.96,97.51 3.4,97.51 3.45,97.56 SV2.9 | C5.1 11.53,80.24 11.53,81.51 | C3.1 11.53,82.78 11.53,82.63 | C4.1 11.53,81.51 | 11.53,81.51 11.53,82.63 | 28.55,97.51 C7.2 27.53,97.51 | 27.53,97.51 C8.2 | IC3.8 46.84,88.88 | 46.84,88.88 46.84,89.13 48.11,90.4 48.11,93.19 47.09,94.21 46.33,94.21 44.3,92.18 | 44.3,92.18 IC3.2 | C9.1 43.62,92.85 44.3,92.18 | 46.84,88.88 C6.1 | v27.53,96.24 27.53,97.51 | IC2.9 30.66,93.27 v31.09,93.7
  pour Top: 0.36,99.54 51.92,99.54 51.92,75.41 0.36,75.41
GND1  (via drill 0.7)
  Top 0.406: SV4.1 82.14,78.21 83.67,76.68 88.49,76.68 90.36,78.55 X2.1 90.36,81.76 | 81.13,93.7 v83.16,93.7 83.92,93.7 86.21,91.42 86.21,84.56 86.72,84.05 88.49,84.05 90.36,82.19 90.36,81.76 | 81.13,93.7 79.6,95.22 v79.6,96.24 | IC6.8 98.91,82.27 98.4,81.76 90.36,81.76 | 81.13,93.7 80.87,93.45 73.25,93.45 69.19,97.51 55.62,97.51 SV3.9
  Bottom 0.406: IC4.5 64.26,92.69 63.46,92.69 | 63.46,92.69 IC4.21 63.46,82.63 63.6,82.63 | 63.46,92.69 62.66,92.69 IC4.3 62.66,94.97 60.81,94.97 60.05,95.73 60.05,96.5 59.03,97.51 55.47,97.51 55.52,97.56 SV3.9 | C10.1 63.6,80.24 63.6,81.51 | C1.1 63.6,82.78 63.6,82.63 | C2.1 63.6,81.51 | 63.6,81.51 63.6,82.63 | 80.62,97.51 C12.2 79.6,97.51 | 79.6,97.51 C13.2 | IC6.8 98.91,88.88 | 98.91,88.88 98.91,89.13 100.18,90.4 100.18,93.19 99.16,94.21 98.4,94.21 96.37,92.18 | 96.37,92.18 IC6.2 | C14.1 95.69,92.85 96.37,92.18 | 98.91,88.88 C11.1 | v79.6,96.24 79.6,97.51 | IC5.9 82.73,93.27 v83.16,93.7
  pour Top: 52.43,99.54 103.99,99.54 103.99,75.41 52.43,75.41
GND2  (via drill 0.7)
  Top 0.406: SV6.1 134.34,78.08 135.87,76.56 140.69,76.56 142.55,78.42 X3.1 142.55,81.64 | 133.32,93.57 v135.36,93.57 136.12,93.57 138.41,91.29 138.41,84.43 138.91,83.92 140.69,83.92 142.55,82.06 142.55,81.64 | 133.32,93.57 131.8,95.1 v131.8,96.11 | IC9.8 151.1,82.14 150.6,81.64 142.55,81.64 | 133.32,93.57 133.07,93.32 125.45,93.32 121.39,97.38 107.82,97.38 SV5.9
  Bottom 0.406: IC7.5 116.45,92.56 115.65,92.56 | 115.65,92.56 IC7.21 115.65,82.51 115.8,82.51 | 115.65,92.56 114.85,92.56 IC7.3 114.85,94.84 113,94.84 112.24,95.61 112.24,96.37 111.23,97.38 107.67,97.38 107.72,97.43 SV5.9 | C17.1 115.8,80.11 115.8,81.38 | C15.1 115.8,82.65 115.8,82.51 | C16.1 115.8,81.38 | 115.8,81.38 115.8,82.51 | 132.82,97.38 C19.2 131.8,97.38 | 131.8,97.38 C20.2 | IC9.8 151.1,88.75 | 151.1,88.75 151.1,89 152.38,90.27 152.38,93.07 151.36,94.08 150.6,94.08 148.56,92.05 | 148.56,92.05 IC9.2 | C21.1 147.89,92.72 148.56,92.05 | 151.1,88.75 C18.1 | v131.8,96.11 131.8,97.38 | IC8.9 134.93,93.14 v135.36,93.57
  pour Top: 104.62,99.42 156.18,99.42 156.18,75.29 104.62,75.29
GND3  (via drill 0.7)
  Top 0.406: SV8.1 30.2,53.67 31.73,52.15 36.55,52.15 38.41,54.01 X4.1 38.41,57.23 | 29.18,69.16 v31.22,69.16 31.98,69.16 34.27,66.88 34.27,60.02 34.77,59.51 36.55,59.51 38.41,57.65 38.41,57.23 | 29.18,69.16 27.66,70.69 v27.66,71.7 | IC12.8 46.97,57.73 46.46,57.23 38.41,57.23 | 29.18,69.16 28.93,68.91 21.31,68.91 17.25,72.97 3.68,72.97 SV7.9
  Bottom 0.406: IC10.5 12.31,68.15 11.51,68.15 | 11.51,68.15 IC10.21 11.51,58.1 11.66,58.1 | 11.51,68.15 10.71,68.15 IC10.3 10.71,70.43 8.87,70.43 8.1,71.2 8.1,71.96 7.09,72.97 3.53,72.97 3.58,73.02 SV7.9 | C24.1 11.66,55.7 11.66,56.97 | C22.1 11.66,58.24 11.66,58.1 | C23.1 11.66,56.97 | 11.66,56.97 11.66,58.1 | 28.68,72.97 C26.2 27.66,72.97 | 27.66,72.97 C27.2 | IC12.8 46.97,64.34 | 46.97,64.34 46.97,64.59 48.23,65.86 48.23,68.66 47.22,69.67 46.46,69.67 44.42,67.64 | 44.42,67.64 IC12.2 | C28.1 43.75,68.31 44.42,67.64 | 46.97,64.34 C25.1 | v27.66,71.7 27.66,72.97 | IC11.9 30.79,68.73 v31.22,69.16
  pour Top: 0.48,75.01 52.04,75.01 52.04,50.88 0.48,50.88
GND4  (via drill 0.7)
  Top 0.406: SV10.1 82.37,53.47 83.9,51.94 88.72,51.94 90.58,53.8 X5.1 90.58,57.02 | 81.36,68.96 v83.39,68.96 84.15,68.96 86.44,66.67 86.44,59.82 86.94,59.31 88.72,59.31 90.58,57.45 90.58,57.02 | 81.36,68.96 79.83,70.48 v79.83,71.5 | IC15.8 99.14,57.53 98.63,57.02 90.58,57.02 | 81.36,68.96 81.1,68.71 73.48,68.71 69.42,72.77 55.85,72.77 SV9.9
  Bottom 0.406: IC13.5 64.48,67.94 63.68,67.94 | 63.68,67.94 IC13.21 63.68,57.89 63.83,57.89 | 63.68,67.94 62.88,67.94 IC13.3 62.88,70.23 61.04,70.23 60.27,70.99 60.27,71.75 59.26,72.77 55.7,72.77 55.75,72.82 SV9.9 | C31.1 63.83,55.5 63.83,56.77 | C29.1 63.83,58.04 63.83,57.89 | C30.1 63.83,56.77 | 63.83,56.77 63.83,57.89 | 80.85,72.77 C33.2 79.83,72.77 | 79.83,72.77 C34.2 | IC15.8 99.14,64.14 | 99.14,64.14 99.14,64.39 100.41,65.66 100.41,68.45 99.39,69.47 98.63,69.47 96.6,67.44 | 96.6,67.44 IC15.2 | C35.1 95.92,68.11 96.6,67.44 | 99.14,64.14 C32.1 | v79.83,71.5 79.83,72.77 | IC14.9 82.96,68.53 v83.39,68.96
  pour Top: 52.65,74.8 104.22,74.8 104.22,50.67 52.65,50.67
GND5  (via drill 0.7)
  Top 0.406: SV12.1 134.67,53.34 136.19,51.82 141.02,51.82 142.88,53.68 X6.1 142.88,56.9 | 133.66,68.83 v135.69,68.83 136.45,68.83 138.74,66.55 138.74,59.69 139.24,59.18 141.02,59.18 142.88,57.32 142.88,56.9 | 133.66,68.83 132.13,70.36 v132.13,71.37 | IC18.8 151.44,57.4 150.93,56.9 142.88,56.9 | 133.66,68.83 133.4,68.58 125.78,68.58 121.72,72.64 108.15,72.64 SV11.9
  Bottom 0.406: IC16.5 116.78,67.82 115.98,67.82 | 115.98,67.82 IC16.21 115.98,57.77 116.13,57.77 | 115.98,67.82 115.18,67.82 IC16.3 115.18,70.1 113.33,70.1 112.57,70.87 112.57,71.63 111.56,72.64 108,72.64 108.05,72.69 SV11.9 | C38.1 116.13,55.37 116.13,56.64 | C36.1 116.13,57.91 116.13,57.77 | C37.1 116.13,56.64 | 116.13,56.64 116.13,57.77 | 133.15,72.64 C40.2 132.13,72.64 | 132.13,72.64 C41.2 | IC18.8 151.44,64.01 | 151.44,64.01 151.44,64.26 152.71,65.53 152.71,68.33 151.69,69.34 150.93,69.34 148.9,67.31 | 148.9,67.31 IC18.2 | C42.1 148.22,67.98 148.9,67.31 | 151.44,64.01 C39.1 | v132.13,71.37 132.13,72.64 | IC17.9 135.25,68.4 v135.69,68.83
  pour Top: 104.95,74.68 156.51,74.68 156.51,50.55 104.95,50.55
GND6  (via drill 0.7)
  Top 0.406: SV14.1 30.2,28.83 31.73,27.3 36.55,27.3 38.41,29.17 X7.1 38.41,32.38 | 29.18,44.32 v31.22,44.32 31.98,44.32 34.27,42.04 34.27,35.18 34.77,34.67 36.55,34.67 38.41,32.81 38.41,32.38 | 29.18,44.32 27.66,45.85 v27.66,46.86 | IC21.8 46.97,32.89 46.46,32.38 38.41,32.38 | 29.18,44.32 28.93,44.07 21.31,44.07 17.25,48.13 3.68,48.13 SV13.9
  Bottom 0.406: IC19.5 12.31,43.31 11.51,43.31 | 11.51,43.31 IC19.21 11.51,33.26 11.66,33.26 | 11.51,43.31 10.71,43.31 IC19.3 10.71,45.59 8.87,45.59 8.1,46.35 8.1,47.12 7.09,48.13 3.53,48.13 3.58,48.18 SV13.9 | C45.1 11.66,30.86 11.66,32.13 | C43.1 11.66,33.4 11.66,33.26 | C44.1 11.66,32.13 | 11.66,32.13 11.66,33.26 | 28.68,48.13 C47.2 27.66,48.13 | 27.66,48.13 C48.2 | IC21.8 46.97,39.5 | 46.97,39.5 46.97,39.75 48.23,41.02 48.23,43.81 47.22,44.83 46.46,44.83 44.42,42.8 | 44.42,42.8 IC21.2 | C49.1 43.75,43.47 44.42,42.8 | 46.97,39.5 C46.1 | v27.66,46.86 27.66,48.13 | IC20.9 30.79,43.89 v31.22,44.32
  pour Top: 0.48,50.16 52.04,50.16 52.04,26.04 0.48,26.04
GND7  (via drill 0.7)
  Top 0.406: SV16.1 82.47,28.83 84,27.3 88.82,27.3 90.69,29.17 X8.1 90.69,32.38 | 81.46,44.32 v83.49,44.32 84.25,44.32 86.54,42.04 86.54,35.18 87.05,34.67 88.82,34.67 90.69,32.81 90.69,32.38 | 81.46,44.32 79.93,45.85 v79.93,46.86 | IC24.8 99.24,32.89 98.73,32.38 90.69,32.38 | 81.46,44.32 81.2,44.07 73.58,44.07 69.52,48.13 55.95,48.13 SV15.9
  Bottom 0.406: IC22.5 64.59,43.31 63.79,43.31 | 63.79,43.31 IC22.21 63.79,33.26 63.93,33.26 | 63.79,43.31 62.99,43.31 IC22.3 62.99,45.59 61.14,45.59 60.38,46.35 60.38,47.12 59.36,48.13 55.8,48.13 55.85,48.18 SV15.9 | C52.1 63.93,30.86 63.93,32.13 | C50.1 63.93,33.4 63.93,33.26 | C51.1 63.93,32.13 | 63.93,32.13 63.93,33.26 | 80.95,48.13 C54.2 79.93,48.13 | 79.93,48.13 C55.2 | IC24.8 99.24,39.5 | 99.24,39.5 99.24,39.75 100.51,41.02 100.51,43.81 99.49,44.83 98.73,44.83 96.7,42.8 | 96.7,42.8 IC24.2 | C56.1 96.02,43.47 96.7,42.8 | 99.24,39.5 C53.1 | v79.93,46.86 79.93,48.13 | IC23.9 83.06,43.89 v83.49,44.32
  pour Top: 52.76,50.16 104.32,50.16 104.32,26.04 52.76,26.04
GND8  (via drill 0.7)
  Top 0.406: SV18.1 134.77,28.6 136.3,27.08 141.12,27.08 142.98,28.94 X9.1 142.98,32.16 | 133.76,44.09 v135.79,44.09 136.55,44.09 138.84,41.81 138.84,34.95 139.34,34.44 141.12,34.44 142.98,32.58 142.98,32.16 | 133.76,44.09 132.23,45.62 v132.23,46.63 | IC27.8 151.54,32.66 151.03,32.16 142.98,32.16 | 133.76,44.09 133.5,43.84 125.88,43.84 121.82,47.9 108.25,47.9 SV17.9
  Bottom 0.406: IC25.5 116.88,43.08 116.08,43.08 | 116.08,43.08 IC25.21 116.08,33.03 116.23,33.03 | 116.08,43.08 115.28,43.08 IC25.3 115.28,45.36 113.44,45.36 112.67,46.13 112.67,46.89 111.66,47.9 108.1,47.9 108.15,47.95 SV17.9 | C59.1 116.23,30.63 116.23,31.9 | C57.1 116.23,33.17 116.23,33.03 | C58.1 116.23,31.9 | 116.23,31.9 116.23,33.03 | 133.25,47.9 C61.2 132.23,47.9 | 132.23,47.9 C62.2 | IC27.8 151.54,39.27 | 151.54,39.27 151.54,39.52 152.81,40.79 152.81,43.59 151.79,44.6 151.03,44.6 149,42.57 | 149,42.57 IC27.2 | C63.1 148.32,43.24 149,42.57 | 151.54,39.27 C60.1 | v132.23,46.63 132.23,47.9 | IC26.9 135.36,43.66 v135.79,44.09
  pour Top: 105.05,49.94 156.62,49.94 156.62,25.81 105.05,25.81
GND9  (via drill 0.7)
  Top 0.406: SV20.1 30.3,3.96 31.83,2.44 36.65,2.44 38.51,4.3 X10.1 38.51,7.52 | 29.29,19.46 v31.32,19.46 32.08,19.46 34.37,17.17 34.37,10.31 34.87,9.8 36.65,9.8 38.51,7.94 38.51,7.52 | 29.29,19.46 27.76,20.98 v27.76,22 | IC30.8 47.07,8.03 46.56,7.52 38.51,7.52 | 29.29,19.46 29.03,19.2 21.41,19.2 17.35,23.27 3.78,23.27 SV19.9
  Bottom 0.406: IC28.5 12.41,18.44 11.61,18.44 | 11.61,18.44 IC28.21 11.61,8.39 11.76,8.39 | 11.61,18.44 10.81,18.44 IC28.3 10.81,20.73 8.97,20.73 8.2,21.49 8.2,22.25 7.19,23.27 3.63,23.27 3.68,23.32 SV19.9 | C66.1 11.76,5.99 11.76,7.26 | C64.1 11.76,8.53 11.76,8.39 | C65.1 11.76,7.26 | 11.76,7.26 11.76,8.39 | 28.78,23.27 C68.2 27.76,23.27 | 27.76,23.27 C69.2 | IC30.8 47.07,14.63 | 47.07,14.63 47.07,14.88 48.34,16.15 48.34,18.95 47.32,19.96 46.56,19.96 44.53,17.93 | 44.53,17.93 IC30.2 | C70.1 43.85,18.61 44.53,17.93 | 47.07,14.63 C67.1 | v27.76,22 27.76,23.27 | IC29.9 30.89,19.02 v31.32,19.46
  pour Top: 0.58,25.3 52.15,25.3 52.15,1.17 0.58,1.17
GND10  (via drill 0.7)
  Top 0.406: SV22.1 82.7,3.86 84.23,2.34 89.05,2.34 90.91,4.2 X11.1 90.91,7.42 | 81.69,19.36 v83.72,19.36 84.48,19.36 86.77,17.07 86.77,10.21 87.27,9.7 89.05,9.7 90.91,7.84 90.91,7.42 | 81.69,19.36 80.16,20.88 v80.16,21.89 | IC33.8 99.47,7.92 98.96,7.42 90.91,7.42 | 81.69,19.36 81.43,19.1 73.81,19.1 69.75,23.16 56.18,23.16 SV21.9
  Bottom 0.406: IC31.5 64.81,18.34 64.01,18.34 | 64.01,18.34 IC31.21 64.01,8.29 64.16,8.29 | 64.01,18.34 63.21,18.34 IC31.3 63.21,20.62 61.37,20.62 60.6,21.39 60.6,22.15 59.59,23.16 56.03,23.16 56.08,23.21 SV21.9 | C73.1 64.16,5.89 64.16,7.16 | C71.1 64.16,8.43 64.16,8.29 | C72.1 64.16,7.16 | 64.16,7.16 64.16,8.29 | 81.18,23.16 C75.2 80.16,23.16 | 80.16,23.16 C76.2 | IC33.8 99.47,14.53 | 99.47,14.53 99.47,14.78 100.74,16.05 100.74,18.85 99.72,19.86 98.96,19.86 96.93,17.83 | 96.93,17.83 IC33.2 | C77.1 96.25,18.5 96.93,17.83 | 99.47,14.53 C74.1 | v80.16,21.89 80.16,23.16 | IC32.9 83.29,18.92 v83.72,19.36
  pour Top: 52.98,25.2 104.55,25.2 104.55,1.07 52.98,1.07
GND11  (via drill 0.7)
  Top 0.406: SV24.1 135,3.86 136.53,2.34 141.35,2.34 143.21,4.2 X12.1 143.21,7.42 | 133.99,19.36 v136.02,19.36 136.78,19.36 139.06,17.07 139.06,10.21 139.57,9.7 141.35,9.7 143.21,7.84 143.21,7.42 | 133.99,19.36 132.46,20.88 v132.46,21.89 | IC36.8 151.76,7.92 151.26,7.42 143.21,7.42 | 133.99,19.36 133.73,19.1 126.11,19.1 122.05,23.16 108.48,23.16 SV23.9
  Bottom 0.406: IC34.5 117.11,18.34 116.31,18.34 | 116.31,18.34 IC34.21 116.31,8.29 116.46,8.29 | 116.31,18.34 115.51,18.34 IC34.3 115.51,20.62 113.67,20.62 112.9,21.39 112.9,22.15 111.89,23.16 108.33,23.16 108.38,23.21 SV23.9 | C80.1 116.46,5.89 116.46,7.16 | C78.1 116.46,8.43 116.46,8.29 | C79.1 116.46,7.16 | 116.46,7.16 116.46,8.29 | 133.48,23.16 C82.2 132.46,23.16 | 132.46,23.16 C83.2 | IC36.8 151.76,14.53 | 151.76,14.53 151.76,14.78 153.03,16.05 153.03,18.85 152.02,19.86 151.26,19.86 149.22,17.83 | 149.22,17.83 IC36.2 | C84.1 148.55,18.5 149.22,17.83 | 151.76,14.53 C81.1 | v132.46,21.89 132.46,23.16 | IC35.9 135.59,18.92 v136.02,19.36
  pour Top: 105.28,25.2 156.84,25.2 156.84,1.07 105.28,1.07
INT  (via drill 1)
  Top 0.406: v27.03,81.25 27.03,84.81 18.9,92.94 7.47,92.94 6.96,93.45 v6.96,93.95
  Bottom 0.406: IC1.32 6.96,92.44 v6.96,93.95 | 27.03,83.54 IC2.12 v27.03,81.25
INT1  (via drill 1)
  Top 0.406: v79.1,81.25 79.1,84.81 70.97,92.94 59.54,92.94 59.03,93.45 v59.03,93.95
  Bottom 0.406: IC4.32 59.03,92.44 v59.03,93.95 | 79.1,83.54 IC5.12 v79.1,81.25
INT2  (via drill 1)
  Top 0.406: v131.29,81.13 131.29,84.68 123.17,92.81 111.73,92.81 111.23,93.32 v111.23,93.83
  Bottom 0.406: IC7.32 111.23,92.31 v111.23,93.83 | 131.29,83.41 IC8.12 v131.29,81.13
INT3  (via drill 1)
  Top 0.406: v27.15,56.72 27.15,60.27 19.02,68.4 7.59,68.4 7.09,68.91 v7.09,69.42
  Bottom 0.406: IC10.32 7.09,67.9 v7.09,69.42 | 27.15,59 IC11.12 v27.15,56.72
INT4  (via drill 1)
  Top 0.406: v79.32,56.52 79.32,60.07 71.2,68.2 59.77,68.2 59.26,68.71 v59.26,69.22
  Bottom 0.406: IC13.32 59.26,67.7 v59.26,69.22 | 79.32,58.8 IC14.12 v79.32,56.52
INT5  (via drill 1)
  Top 0.406: v131.62,56.39 131.62,59.94 123.5,68.07 112.06,68.07 111.56,68.58 v111.56,69.09
  Bottom 0.406: IC16.32 111.56,67.57 v111.56,69.09 | 131.62,58.67 IC17.12 v131.62,56.39
INT6  (via drill 1)
  Top 0.406: v27.15,31.88 27.15,35.43 19.02,43.56 7.59,43.56 7.09,44.07 v7.09,44.58
  Bottom 0.406: IC19.32 7.09,43.06 v7.09,44.58 | 27.15,34.16 IC20.12 v27.15,31.88
INT7  (via drill 1)
  Top 0.406: v79.43,31.88 79.43,35.43 71.3,43.56 59.87,43.56 59.36,44.07 v59.36,44.58
  Bottom 0.406: IC22.32 59.36,43.06 v59.36,44.58 | 79.43,34.16 IC23.12 v79.43,31.88
INT8  (via drill 1)
  Top 0.406: v131.72,31.65 131.72,35.2 123.6,43.33 112.17,43.33 111.66,43.84 v111.66,44.35
  Bottom 0.406: IC25.32 111.66,42.83 v111.66,44.35 | 131.72,33.93 IC26.12 v131.72,31.65
INT9  (via drill 1)
  Top 0.406: v27.25,7.01 27.25,10.57 19.13,18.69 7.7,18.69 7.19,19.2 v7.19,19.71
  Bottom 0.406: IC28.32 7.19,18.19 v7.19,19.71 | 27.25,9.3 IC29.12 v27.25,7.01
INT10  (via drill 1)
  Top 0.406: v79.65,6.91 79.65,10.46 71.53,18.59 60.1,18.59 59.59,19.1 v59.59,19.61
  Bottom 0.406: IC31.32 59.59,18.09 v59.59,19.61 | 79.65,9.2 IC32.12 v79.65,6.91
INT11  (via drill 1)
  Top 0.406: v131.95,6.91 131.95,10.46 123.83,18.59 112.39,18.59 111.89,19.1 v111.89,19.61
  Bottom 0.406: IC34.32 111.89,18.09 v111.89,19.61 | 131.95,9.2 IC35.12 v131.95,6.91
MISO
  Bottom 0.406: IC1.16 17.12,86.84 17.12,81.25 18.14,80.24 21.18,80.24 23.22,82.27 IC2.15 23.22,86.84 33.12,86.84 R4.2
MISO1
  Bottom 0.406: IC4.16 69.19,86.84 69.19,81.25 70.21,80.24 73.25,80.24 75.29,82.27 IC5.15 75.29,86.84 85.19,86.84 R10.2
MISO2
  Bottom 0.406: IC7.16 121.39,86.71 121.39,81.13 122.4,80.11 125.45,80.11 127.48,82.14 IC8.15 127.48,86.72 137.39,86.72 R16.2
MISO3
  Bottom 0.406: IC10.16 17.25,62.3 17.25,56.72 18.26,55.7 21.31,55.7 23.34,57.73 IC11.15 23.34,62.31 33.25,62.31 R22.2
MISO4
  Bottom 0.406: IC13.16 69.42,62.1 69.42,56.52 70.43,55.5 73.48,55.5 75.51,57.53 IC14.15 75.51,62.1 85.42,62.1 R28.2
MISO5
  Bottom 0.406: IC16.16 121.72,61.97 121.72,56.39 122.73,55.37 125.78,55.37 127.81,57.4 IC17.15 127.81,61.98 137.72,61.98 R34.2
MISO6
  Bottom 0.406: IC19.16 17.25,37.46 17.25,31.88 18.26,30.86 21.31,30.86 23.34,32.89 IC20.15 23.34,37.47 33.25,37.47 R40.2
MISO7
  Bottom 0.406: IC22.16 69.52,37.46 69.52,31.88 70.54,30.86 73.58,30.86 75.62,32.89 IC23.15 75.62,37.47 85.52,37.47 R46.2
MISO8
  Bottom 0.406: IC25.16 121.82,37.23 121.82,31.65 122.83,30.63 125.88,30.63 127.91,32.66 IC26.15 127.91,37.24 137.82,37.24 R52.2
MISO9
  Bottom 0.406: IC28.16 17.35,12.59 17.35,7.01 18.36,5.99 21.41,5.99 23.44,8.03 IC29.15 23.44,12.6 33.35,12.6 R58.2
MISO10
  Bottom 0.406: IC31.16 69.75,12.49 69.75,6.91 70.76,5.89 73.81,5.89 75.84,7.92 IC32.15 75.84,12.5 85.75,12.5 R64.2
MISO11
  Bottom 0.406: IC34.16 122.05,12.49 122.05,6.91 123.06,5.89 126.11,5.89 128.14,7.92 IC35.15 128.14,12.5 138.05,12.5 R70.2
MOSI
  Bottom 0.406: IC1.15 15.57,87.63 15.6,87.61 14.58,87.61 14.58,86.84 16.36,85.06 16.36,84.81 16.36,81 17.88,79.48 21.69,79.48 24.49,82.27 IC2.14 24.49,86.08 31.34,86.08 R2.2
MOSI1
  Bottom 0.406: IC4.15 67.64,87.63 67.67,87.61 66.65,87.61 66.65,86.84 68.43,85.06 68.43,84.81 68.43,81 69.95,79.48 73.76,79.48 76.56,82.27 IC5.14 76.56,86.08 83.41,86.08 R8.2
MOSI2
  Bottom 0.406: IC7.15 119.84,87.5 119.86,87.48 118.85,87.48 118.85,86.72 120.62,84.94 120.62,84.68 120.62,80.87 122.15,79.35 125.96,79.35 128.75,82.14 IC8.14 128.75,85.95 135.61,85.95 R14.2
MOSI3
  Bottom 0.406: IC10.15 15.7,63.09 15.72,63.07 14.71,63.07 14.71,62.31 16.48,60.53 16.48,60.27 16.48,56.46 18.01,54.94 21.82,54.94 24.61,57.73 IC11.14 24.61,61.54 31.47,61.54 R20.2
MOSI4
  Bottom 0.406: IC13.15 67.87,62.89 67.89,62.87 66.88,62.87 66.88,62.1 68.66,60.33 68.66,60.07 68.66,56.26 70.18,54.74 73.99,54.74 76.78,57.53 IC14.14 76.78,61.34 83.64,61.34 R26.2
MOSI5
  Bottom 0.406: IC16.15 120.17,62.76 120.19,62.74 119.18,62.74 119.18,61.98 120.95,60.2 120.95,59.94 120.95,56.13 122.48,54.61 126.29,54.61 129.08,57.4 IC17.14 129.08,61.21 135.94,61.21 R32.2
MOSI6
  Bottom 0.406: IC19.15 15.7,38.25 15.72,38.23 14.71,38.23 14.71,37.47 16.48,35.69 16.48,35.43 16.48,31.62 18.01,30.1 21.82,30.1 24.61,32.89 IC20.14 24.61,36.7 31.47,36.7 R38.2
MOSI7
  Bottom 0.406: IC22.15 67.97,38.25 68,38.23 66.98,38.23 66.98,37.47 68.76,35.69 68.76,35.43 68.76,31.62 70.28,30.1 74.09,30.1 76.89,32.89 IC23.14 76.89,36.7 83.74,36.7 R44.2
MOSI8
  Bottom 0.406: IC25.15 120.27,38.02 120.29,38 119.28,38 119.28,37.24 121.06,35.46 121.06,35.2 121.06,31.39 122.58,29.87 126.39,29.87 129.18,32.66 IC26.14 129.18,36.47 136.04,36.47 R50.2
MOSI9
  Bottom 0.406: IC28.15 15.8,13.39 15.82,13.36 14.81,13.36 14.81,12.6 16.59,10.82 16.59,10.57 16.59,6.76 18.11,5.23 21.92,5.23 24.71,8.03 IC29.14 24.71,11.84 31.57,11.84 R56.2
MOSI10
  Bottom 0.406: IC31.15 68.2,13.28 68.22,13.26 67.21,13.26 67.21,12.5 68.99,10.72 68.99,10.46 68.99,6.66 70.51,5.13 74.32,5.13 77.11,7.92 IC32.14 77.11,11.73 83.97,11.73 R62.2
MOSI11
  Bottom 0.406: IC34.15 120.5,13.28 120.52,13.26 119.51,13.26 119.51,12.5 121.28,10.72 121.28,10.46 121.28,6.66 122.81,5.13 126.62,5.13 129.41,7.92 IC35.14 129.41,11.73 136.27,11.73 R68.2
N$1
  Bottom 0.406: X1.2 41.79,81.48 40.49,82.78 40.49,85.57 41.25,86.33 43.28,86.33 44.3,85.32 IC3.7
N$2
  Bottom 0.406: X1.3 45.29,80.01 42.01,83.29 42.01,84.3 IC3.6
N$3
  pour Bottom: 0.61,99.54 51.92,99.54 51.92,75.41 0.36,75.41 0.36,99.54
N$4
  Bottom 0.406: IC4.20 64.26,84.67 64.26,83.8 65.38,83.8 65.47,83.8 65.47,83.45 C1.2
N$5
  Bottom 0.406: IC1.20 12.19,84.67 12.19,83.8 13.31,83.8 13.4,83.8 13.4,83.45 C3.2
N$6
  Bottom 0.406: IC5.1 71.48,89.89 72.75,88.62 81.64,88.62 82.91,89.89 89.26,89.89 98.15,89.89 98.91,90.65 IC6.1
N$7
  Bottom 0.406: IC5.2 72.75,89.89 73.25,89.38 81.38,89.38 82.65,90.65 90.02,90.65 IC6.4
N$8
  Bottom 0.406: IC1.7 13.79,92.43 14.58,92.43 15.85,93.7 15.85,96.24 16.1,96.5 19.91,96.5 21.95,94.46 IC2.3
N$9
  Bottom 0.406: IC5.8 80.37,94.72 81.38,95.73 81.89,95.73 Q1.2 82.02,97.13 82.14,97.26 82.23,97.34 C12.1
N$10
  Bottom 0.406: IC5.7 79.1,94.72 78.08,95.73 77.32,95.73 Q1.1 77.19,97.13 76.81,97.51 C13.1
N$11
  Bottom 0.406: IC2.1 19.41,89.89 20.68,88.62 29.57,88.62 30.84,89.89 37.19,89.89 46.08,89.89 46.84,90.65 IC3.1
N$12
  Bottom 0.406: IC2.2 20.68,89.89 21.18,89.38 29.31,89.38 30.58,90.65 37.95,90.65 IC3.4
N$13
  Bottom 0.406: IC2.8 28.3,94.72 29.31,95.73 29.82,95.73 Q2.2 29.95,97.13 30.07,97.26 30.16,97.34 C7.1
N$14
  Bottom 0.406: IC2.7 27.03,94.72 26.01,95.73 25.25,95.73 Q2.1 25.12,97.13 24.74,97.51 C8.1
N$15
  Bottom 0.406: R2.1 31.09,82.78 31.09,82.27 SV1.2
N$16
  Bottom 0.406: SV1.6 34.39,80.75 33.12,79.48 27.53,79.48 | R3.1 27.53,79.48 | R3.1 27.03,79.48 | R3.1 27.53,79.48
N$17
  Bottom 0.406: SV1.4 33.12,81.76 R4.1
N$18
  Bottom 0.406: X2.2 93.86,81.48 92.56,82.78 92.56,85.57 93.32,86.33 95.35,86.33 96.37,85.32 IC6.7
N$19
  Bottom 0.406: X2.3 97.36,80.01 94.08,83.29 94.08,84.3 IC6.6
N$20
  Bottom 0.406: R8.1 83.16,82.78 83.16,82.27 SV4.2
N$21
  Bottom 0.406: SV4.6 86.46,80.75 85.19,79.48 79.6,79.48 | R9.1 79.6,79.48 | R9.1 79.1,79.48 | R9.1 79.6,79.48
N$22
  Bottom 0.406: SV4.4 85.19,81.76 R10.1
N$23
  Bottom 0.406: IC4.7 65.86,92.43 66.65,92.43 67.92,93.7 67.92,96.24 68.17,96.5 71.98,96.5 74.02,94.46 IC5.3
N$24
  pour Bottom: 52.68,99.54 103.99,99.54 103.99,75.41 52.43,75.41 52.43,99.54
N$25
  Bottom 0.406: IC7.20 116.45,84.54 116.45,83.67 117.58,83.67 117.67,83.67 117.67,83.33 C15.2
N$26
  Bottom 0.406: IC8.1 123.67,89.76 124.94,88.49 133.83,88.49 135.1,89.76 141.45,89.76 150.34,89.76 151.1,90.53 IC9.1
N$27
  Bottom 0.406: IC8.2 124.94,89.76 125.45,89.26 133.58,89.26 134.85,90.53 142.22,90.53 IC9.4
N$28
  Bottom 0.406: IC8.8 132.56,94.59 133.58,95.61 134.09,95.61 Q3.2 134.21,97 134.34,97.13 134.43,97.22 C19.1
N$29
  Bottom 0.406: IC8.7 131.29,94.59 130.28,95.61 129.51,95.61 Q3.1 129.39,97 129.01,97.38 C20.1
N$30
  Bottom 0.406: X3.2 146.05,81.35 144.75,82.65 144.75,85.45 145.52,86.21 147.55,86.21 148.56,85.19 IC9.7
N$31
  Bottom 0.406: X3.3 149.55,79.89 146.28,83.16 146.28,84.18 IC9.6
N$32
  Bottom 0.406: R14.1 135.36,82.65 135.36,82.14 SV6.2
N$33
  Bottom 0.406: SV6.6 138.66,80.62 137.39,79.35 131.8,79.35 | R15.1 131.8,79.35 | R15.1 131.29,79.35 | R15.1 131.8,79.35
N$34
  Bottom 0.406: SV6.4 137.39,81.64 R16.1
N$35
  Bottom 0.406: IC7.7 118.05,92.3 118.85,92.3 120.12,93.57 120.12,96.11 120.37,96.37 124.18,96.37 126.21,94.34 IC8.3
N$36
  pour Bottom: 104.88,99.42 156.18,99.42 156.18,75.29 104.62,75.29 104.62,99.42
N$37
  Bottom 0.406: IC10.20 12.31,60.13 12.31,59.26 13.44,59.26 13.53,59.26 13.53,58.92 C22.2
N$38
  Bottom 0.406: IC11.1 19.53,65.35 20.8,64.08 29.69,64.08 30.96,65.35 37.31,65.35 46.2,65.35 46.97,66.12 IC12.1
N$39
  Bottom 0.406: IC11.2 20.8,65.35 21.31,64.85 29.44,64.85 30.71,66.12 38.08,66.12 IC12.4
N$40
  Bottom 0.406: IC11.8 28.42,70.18 29.44,71.2 29.95,71.2 Q4.2 30.07,72.59 30.2,72.72 30.29,72.81 C26.1
N$41
  Bottom 0.406: IC11.7 27.15,70.18 26.14,71.2 25.38,71.2 Q4.1 25.25,72.59 24.87,72.97 C27.1
N$42
  Bottom 0.406: X4.2 41.91,56.94 40.62,58.24 40.62,61.04 41.38,61.8 43.41,61.8 44.42,60.78 IC12.7
N$43
  Bottom 0.406: X4.3 45.41,55.48 42.14,58.75 42.14,59.77 IC12.6
N$44
  Bottom 0.406: R20.1 31.22,58.24 31.22,57.73 SV8.2
N$45
  Bottom 0.406: SV8.6 34.52,56.21 33.25,54.94 27.66,54.94 | R21.1 27.66,54.94 | R21.1 27.15,54.94 | R21.1 27.66,54.94
N$46
  Bottom 0.406: SV8.4 33.25,57.23 R22.1
N$47
  Bottom 0.406: IC10.7 13.91,67.89 14.71,67.89 15.98,69.16 15.98,71.7 16.23,71.96 20.04,71.96 22.07,69.93 IC11.3
N$48
  pour Bottom: 0.74,75.01 52.04,75.01 52.04,50.88 0.48,50.88 0.48,75.01
N$49
  Bottom 0.406: IC13.20 64.48,59.92 64.48,59.05 65.61,59.05 65.7,59.05 65.7,58.71 C29.2
N$50
  Bottom 0.406: IC14.1 71.7,65.15 72.97,63.88 81.86,63.88 83.13,65.15 89.48,65.15 98.37,65.15 99.14,65.91 IC15.1
N$51
  Bottom 0.406: IC14.2 72.97,65.15 73.48,64.64 81.61,64.64 82.88,65.91 90.25,65.91 IC15.4
N$52
  Bottom 0.406: IC14.8 80.59,69.98 81.61,70.99 82.12,70.99 Q5.2 82.25,72.39 82.37,72.52 82.46,72.61 C33.1
N$53
  Bottom 0.406: IC14.7 79.32,69.98 78.31,70.99 77.55,70.99 Q5.1 77.42,72.39 77.04,72.77 C34.1
N$54
  Bottom 0.406: X5.2 94.08,56.74 92.79,58.04 92.79,60.83 93.55,61.59 95.58,61.59 96.6,60.58 IC15.7
N$55
  Bottom 0.406: X5.3 97.58,55.27 94.31,58.55 94.31,59.56 IC15.6
N$56
  Bottom 0.406: R26.1 83.39,58.04 83.39,57.53 SV10.2
N$57
  Bottom 0.406: SV10.6 86.69,56.01 85.42,54.74 79.83,54.74 | R27.1 79.83,54.74 | R27.1 79.32,54.74 | R27.1 79.83,54.74
N$58
  Bottom 0.406: SV10.4 85.42,57.02 R28.1
N$59
  Bottom 0.406: IC13.7 66.08,67.69 66.88,67.69 68.15,68.96 68.15,71.5 68.4,71.75 72.21,71.75 74.24,69.72 IC14.3
N$60
  pour Bottom: 52.91,74.8 104.22,74.8 104.22,50.67 52.65,50.67 52.65,74.8
N$61
  Bottom 0.406: IC16.20 116.78,59.8 116.78,58.93 117.91,58.93 118,58.93 118,58.59 C36.2
N$62
  Bottom 0.406: IC17.1 124,65.02 125.27,63.75 134.16,63.75 135.43,65.02 141.78,65.02 150.67,65.02 151.44,65.79 IC18.1
N$63
  Bottom 0.406: IC17.2 125.27,65.02 125.78,64.52 133.91,64.52 135.18,65.79 142.54,65.79 IC18.4
N$64
  Bottom 0.406: IC17.8 132.89,69.85 133.91,70.87 134.42,70.87 Q6.2 134.54,72.26 134.67,72.39 134.76,72.48 C40.1
N$65
  Bottom 0.406: IC17.7 131.62,69.85 130.61,70.87 129.84,70.87 Q6.1 129.72,72.26 129.34,72.64 C41.1
N$66
  Bottom 0.406: X6.2 146.38,56.61 145.09,57.91 145.09,60.71 145.85,61.47 147.88,61.47 148.9,60.45 IC18.7
N$67
  Bottom 0.406: X6.3 149.88,55.15 146.61,58.42 146.61,59.44 IC18.6
N$68
  Bottom 0.406: R32.1 135.69,57.91 135.69,57.4 SV12.2
N$69
  Bottom 0.406: SV12.6 138.99,55.88 137.72,54.61 132.13,54.61 | R33.1 132.13,54.61 | R33.1 131.62,54.61 | R33.1 132.13,54.61
N$70
  Bottom 0.406: SV12.4 137.72,56.9 R34.1
N$71
  Bottom 0.406: IC16.7 118.38,67.56 119.18,67.56 120.45,68.83 120.45,71.37 120.7,71.63 124.51,71.63 126.54,69.6 IC17.3
N$72
  pour Bottom: 105.21,74.68 156.51,74.68 156.51,50.55 104.95,50.55 104.95,74.68
N$73
  Bottom 0.406: IC19.20 12.31,35.29 12.31,34.42 13.44,34.42 13.53,34.42 13.53,34.08 C43.2
N$74
  Bottom 0.406: IC20.1 19.53,40.51 20.8,39.24 29.69,39.24 30.96,40.51 37.31,40.51 46.2,40.51 46.97,41.27 IC21.1
N$75
  Bottom 0.406: IC20.2 20.8,40.51 21.31,40.01 29.44,40.01 30.71,41.27 38.08,41.27 IC21.4
N$76
  Bottom 0.406: IC20.8 28.42,45.34 29.44,46.35 29.95,46.35 Q7.2 30.07,47.75 30.2,47.88 30.29,47.97 C47.1
N$77
  Bottom 0.406: IC20.7 27.15,45.34 26.14,46.35 25.38,46.35 Q7.1 25.25,47.75 24.87,48.13 C48.1
N$78
  Bottom 0.406: X7.2 41.91,32.1 40.62,33.4 40.62,36.2 41.38,36.96 43.41,36.96 44.42,35.94 IC21.7
N$79
  Bottom 0.406: X7.3 45.41,30.64 42.14,33.91 42.14,34.92 IC21.6
N$80
  Bottom 0.406: R38.1 31.22,33.4 31.22,32.89 SV14.2
N$81
  Bottom 0.406: SV14.6 34.52,31.37 33.25,30.1 27.66,30.1 | R39.1 27.66,30.1 | R39.1 27.15,30.1 | R39.1 27.66,30.1
N$82
  Bottom 0.406: SV14.4 33.25,32.38 R40.1
N$83
  Bottom 0.406: IC19.7 13.91,43.05 14.71,43.05 15.98,44.32 15.98,46.86 16.23,47.12 20.04,47.12 22.07,45.09 IC20.3
N$84
  pour Bottom: 0.74,50.16 52.04,50.16 52.04,26.04 0.48,26.04 0.48,50.16
N$85
  Bottom 0.406: IC22.20 64.59,35.29 64.59,34.42 65.71,34.42 65.8,34.42 65.8,34.08 C50.2
N$86
  Bottom 0.406: IC23.1 71.81,40.51 73.08,39.24 81.97,39.24 83.24,40.51 89.59,40.51 98.48,40.51 99.24,41.27 IC24.1
N$87
  Bottom 0.406: IC23.2 73.08,40.51 73.58,40.01 81.71,40.01 82.98,41.27 90.35,41.27 IC24.4
N$88
  Bottom 0.406: IC23.8 80.7,45.34 81.71,46.35 82.22,46.35 Q8.2 82.35,47.75 82.47,47.88 82.56,47.97 C54.1
N$89
  Bottom 0.406: IC23.7 79.43,45.34 78.41,46.35 77.65,46.35 Q8.1 77.52,47.75 77.14,48.13 C55.1
N$90
  Bottom 0.406: X8.2 94.19,32.1 92.89,33.4 92.89,36.2 93.65,36.96 95.68,36.96 96.7,35.94 IC24.7
N$91
  Bottom 0.406: X8.3 97.69,30.64 94.41,33.91 94.41,34.92 IC24.6
N$92
  Bottom 0.406: R44.1 83.49,33.4 83.49,32.89 SV16.2
N$93
  Bottom 0.406: SV16.6 86.79,31.37 85.52,30.1 79.93,30.1 | R45.1 79.93,30.1 | R45.1 79.43,30.1 | R45.1 79.93,30.1
N$94
  Bottom 0.406: SV16.4 85.52,32.38 R46.1
N$95
  Bottom 0.406: IC22.7 66.19,43.05 66.98,43.05 68.25,44.32 68.25,46.86 68.5,47.12 72.31,47.12 74.35,45.09 IC23.3
N$96
  pour Bottom: 53.01,50.16 104.32,50.16 104.32,26.04 52.76,26.04 52.76,50.16
N$97
  Bottom 0.406: IC25.20 116.88,35.06 116.88,34.19 118.01,34.19 118.1,34.19 118.1,33.85 C57.2
N$98
  Bottom 0.406: IC26.1 124.1,40.28 125.37,39.01 134.26,39.01 135.53,40.28 141.88,40.28 150.77,40.28 151.54,41.05 IC27.1
N$99
  Bottom 0.406: IC26.2 125.37,40.28 125.88,39.78 134.01,39.78 135.28,41.05 142.65,41.05 IC27.4
N$100
  Bottom 0.406: IC26.8 132.99,45.11 134.01,46.13 134.52,46.13 Q9.2 134.65,47.52 134.77,47.65 134.86,47.74 C61.1
N$101
  Bottom 0.406: IC26.7 131.72,45.11 130.71,46.13 129.95,46.13 Q9.1 129.82,47.52 129.44,47.9 C62.1
N$102
  Bottom 0.406: X9.2 146.48,31.87 145.19,33.17 145.19,35.97 145.95,36.73 147.98,36.73 149,35.71 IC27.7
N$103
  Bottom 0.406: X9.3 149.98,30.41 146.71,33.68 146.71,34.7 IC27.6
N$104
  Bottom 0.406: R50.1 135.79,33.17 135.79,32.66 SV18.2
N$105
  Bottom 0.406: SV18.6 139.09,31.14 137.82,29.87 132.23,29.87 | R51.1 132.23,29.87 | R51.1 131.72,29.87 | R51.1 132.23,29.87
N$106
  Bottom 0.406: SV18.4 137.82,32.16 R52.1
N$107
  Bottom 0.406: IC25.7 118.48,42.82 119.28,42.82 120.55,44.09 120.55,46.63 120.8,46.89 124.61,46.89 126.64,44.86 IC26.3
N$108
  pour Bottom: 105.31,49.94 156.62,49.94 156.62,25.81 105.05,25.81 105.05,49.94
N$109
  Bottom 0.406: IC28.20 12.41,10.42 12.41,9.55 13.54,9.55 13.63,9.55 13.63,9.21 C64.2
N$110
  Bottom 0.406: IC29.1 19.63,15.65 20.9,14.38 29.79,14.38 31.06,15.65 37.41,15.65 46.3,15.65 47.07,16.41 IC30.1
N$111
  Bottom 0.406: IC29.2 20.9,15.65 21.41,15.14 29.54,15.14 30.81,16.41 38.18,16.41 IC30.4
N$112
  Bottom 0.406: IC29.8 28.52,20.47 29.54,21.49 30.05,21.49 Q10.2 30.18,22.89 30.3,23.01 30.39,23.1 C68.1
N$113